# Altium PCB PCB1.PcbDoc
Units mm, origin at the board's own origin, x right, y up, seen from the top; angles counter-clockwise.
Board outline 127 x 101.6 mm, 4 copper layers (Top Layer, Internal Plane 1, Internal Plane 2, Bottom Layer); 11 components, 10 nets, 31 pads, 6 vias.
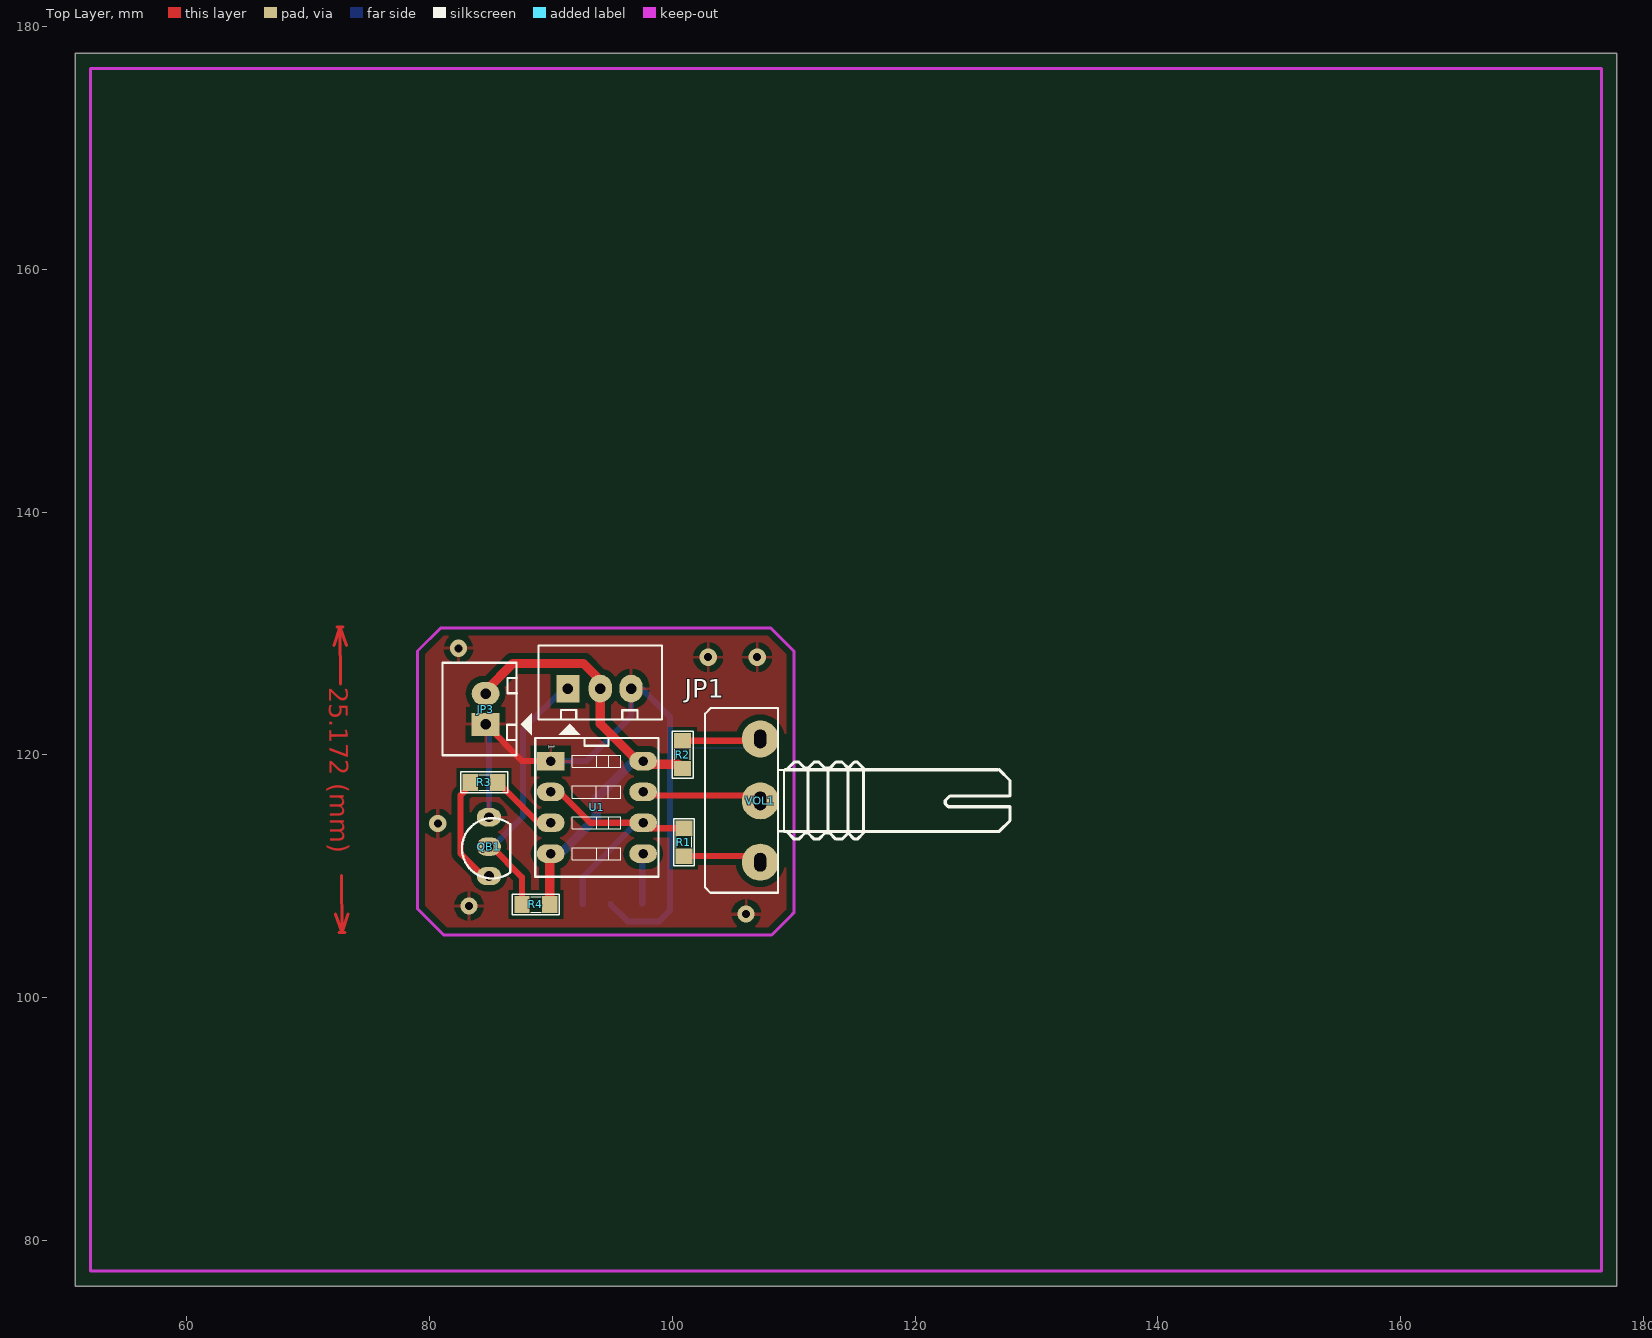
[diagram p0: Top Layer view]
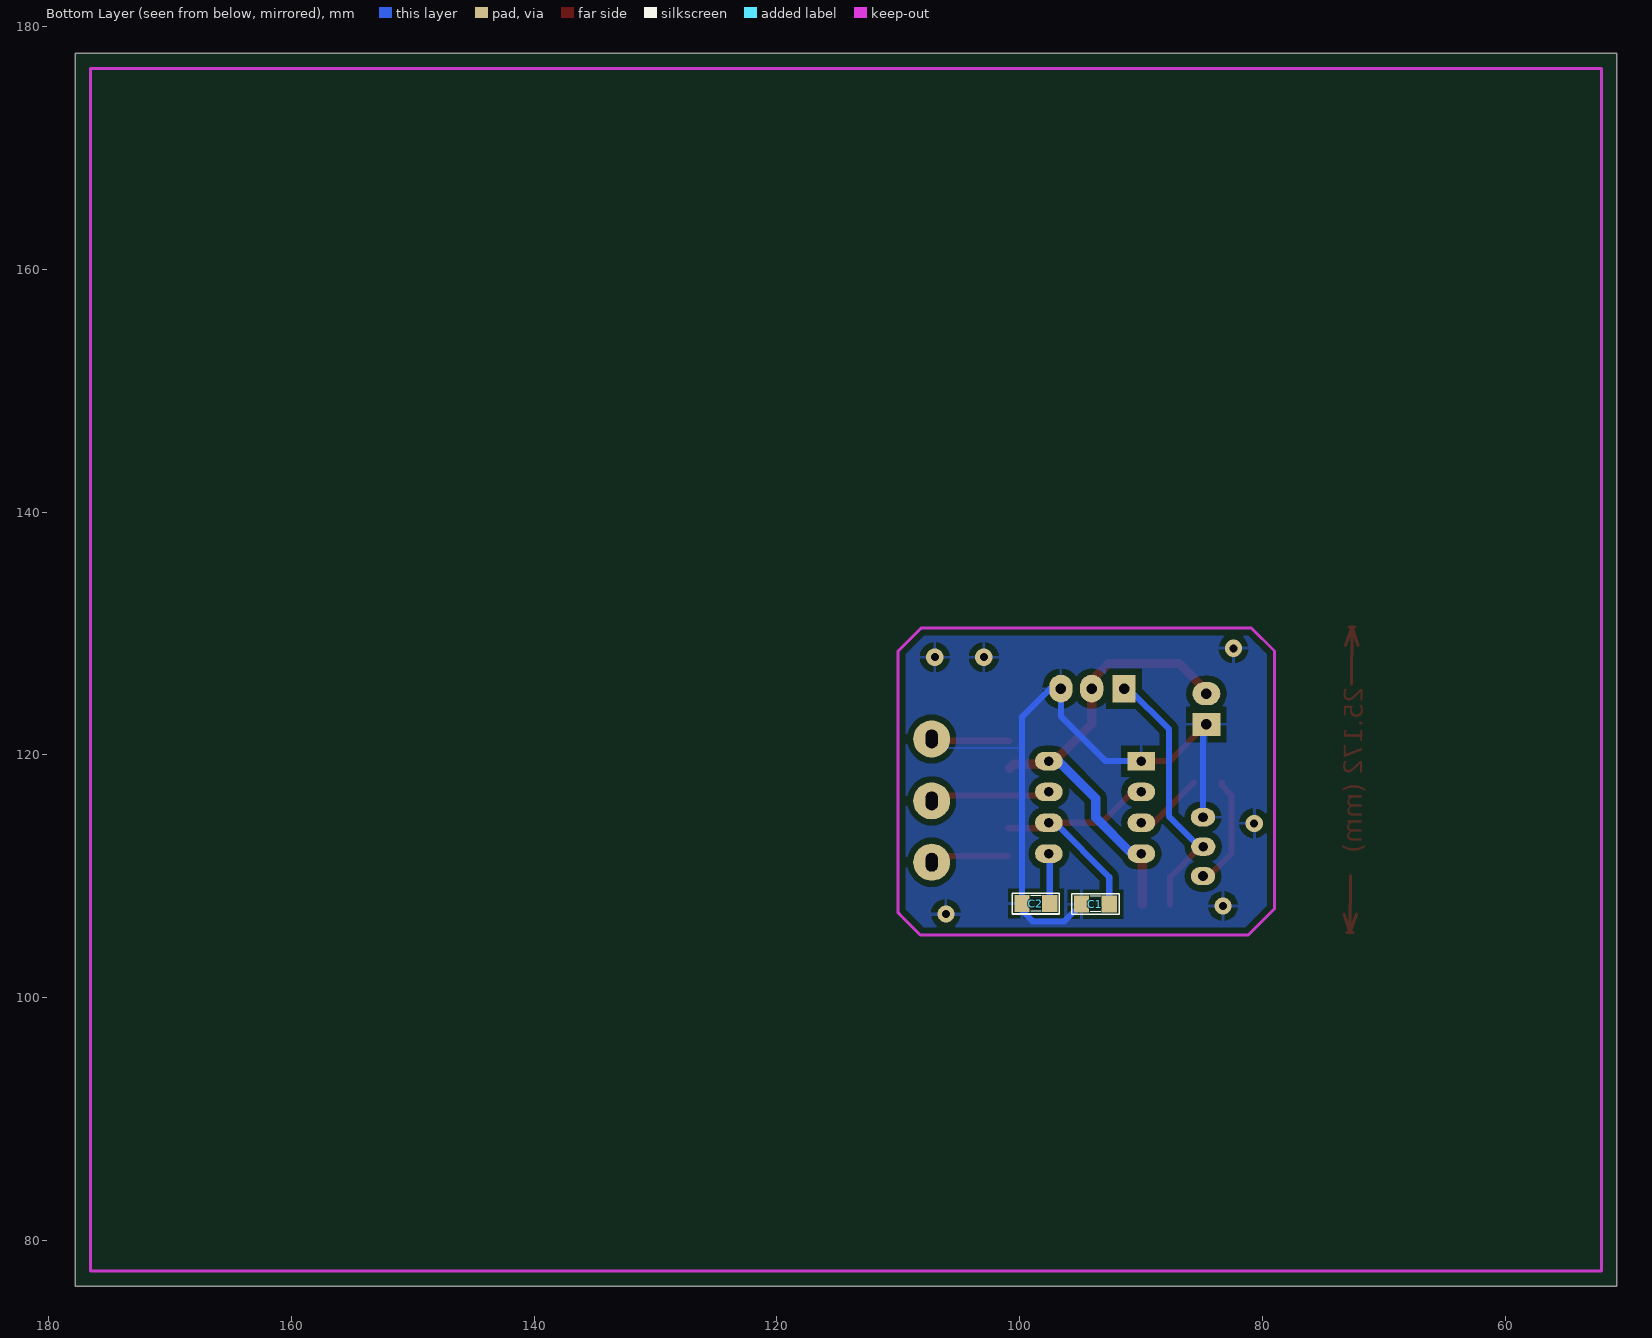
[diagram p1: Bottom Layer view, seen from below]
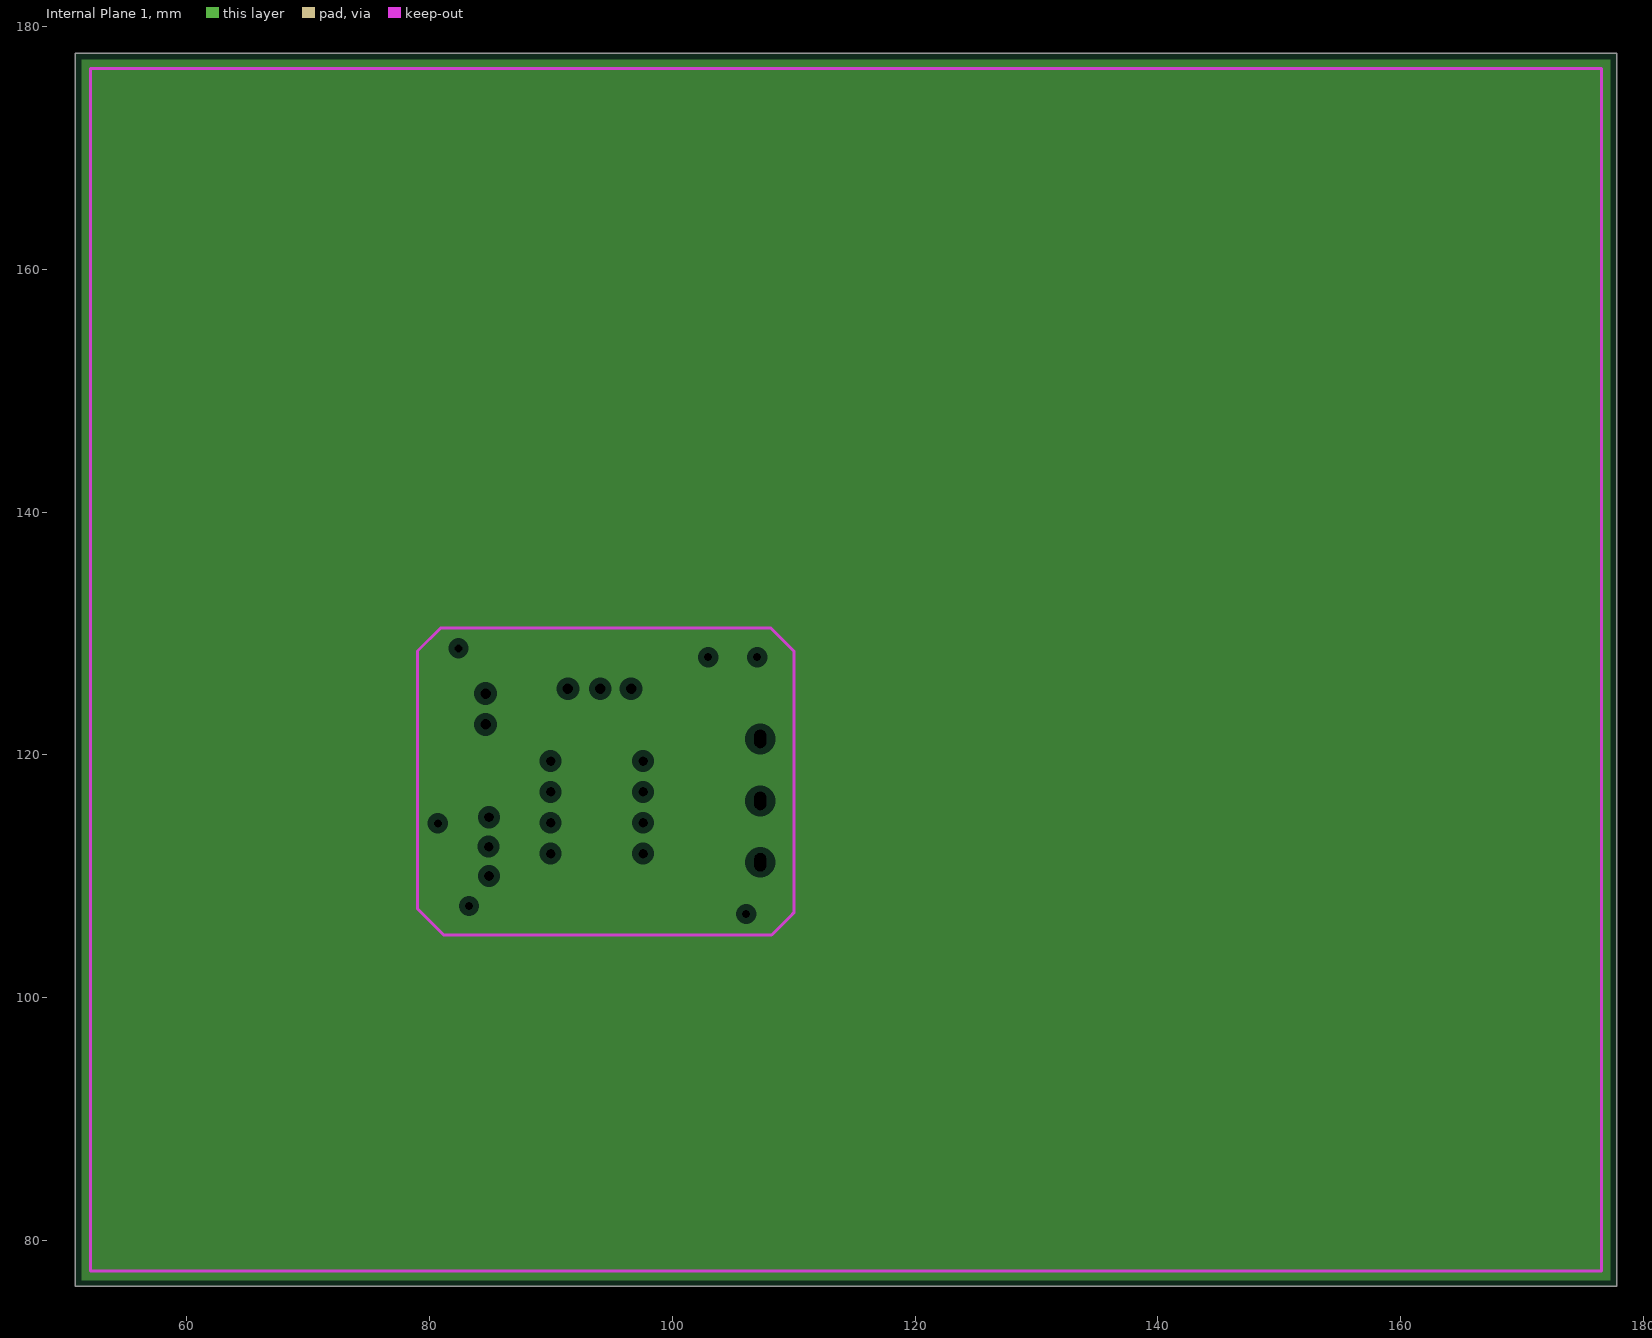
[diagram p2: Internal Plane 1, clearances drawn from the general rule]
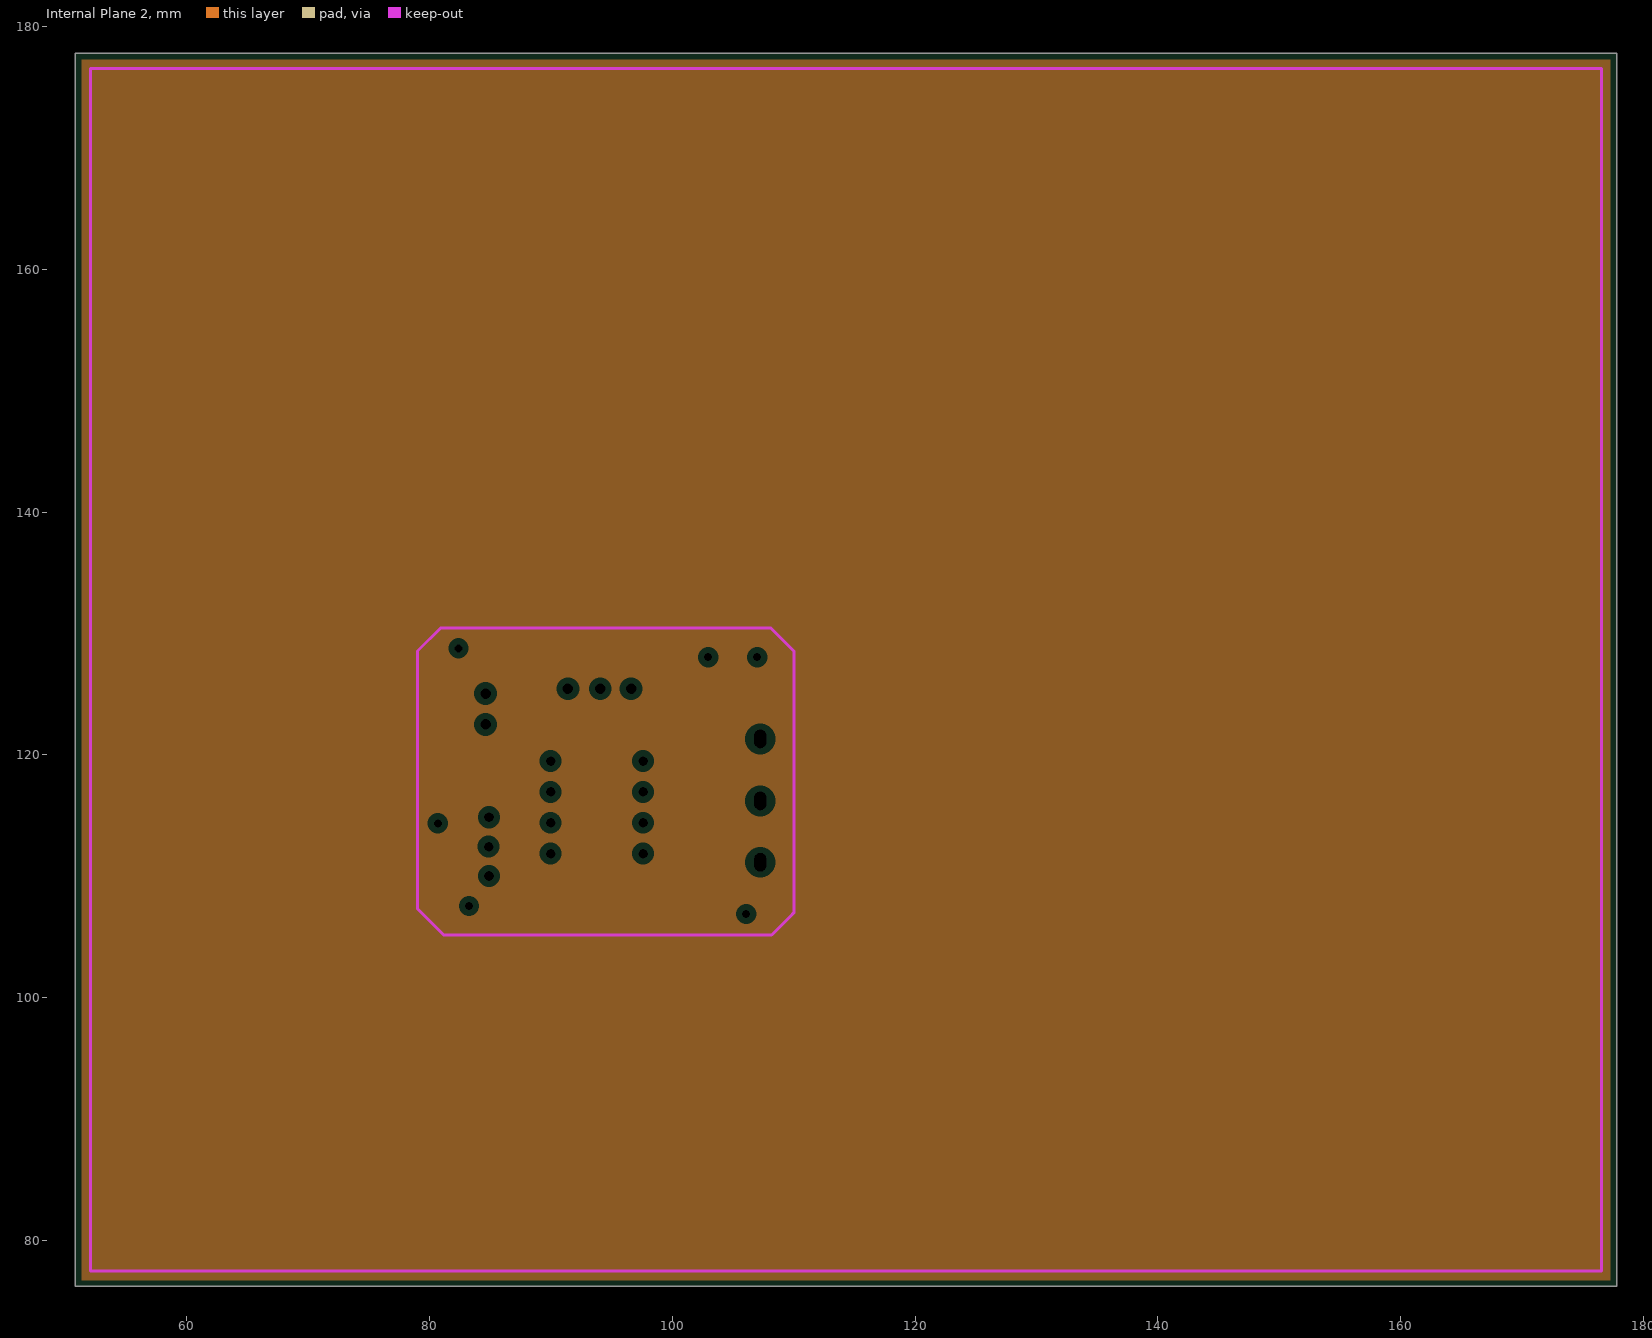
[diagram p3: Internal Plane 2, clearances drawn from the general rule]
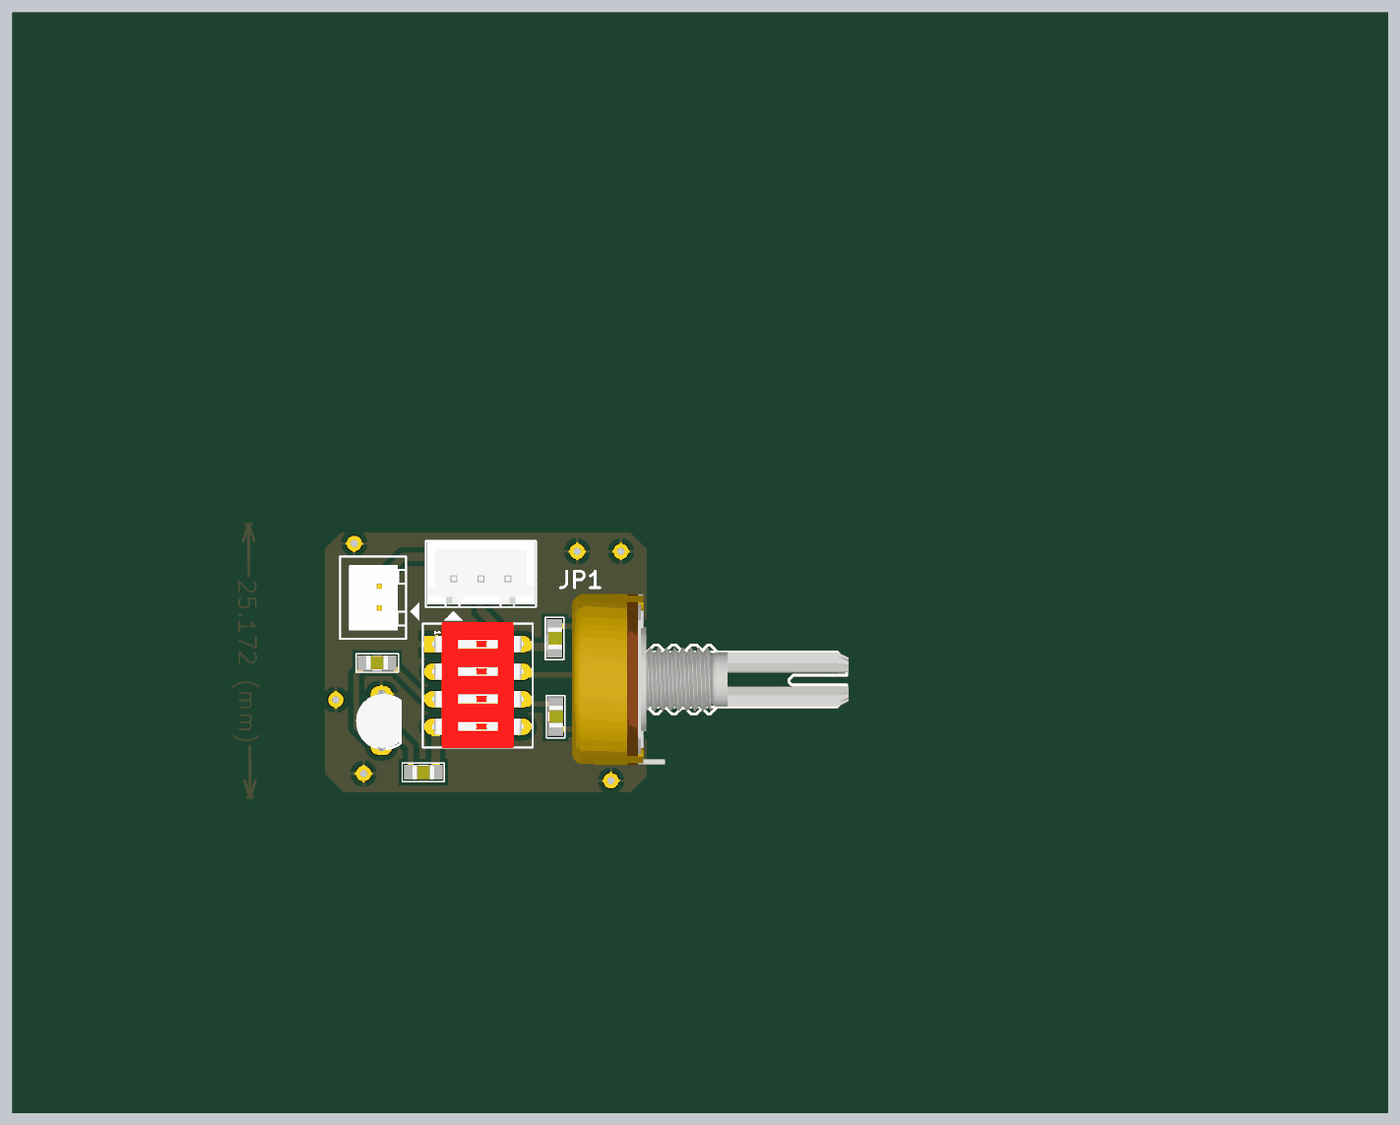
[diagram p4: 3D render of the assembled board from above, using the file's embedded part models]

## Layer stack, top to bottom
Top Solder: solder mask 0.0102, Solder Resist, Dk 3.5
Top Layer: signal copper 0.0356
Dielectric1: dielectric 0.32, FR-4, Dk 4.8
Internal Plane 1: plane copper 0.0356
Dielectric2: dielectric 0.32, FR-4, Dk 4.8
Internal Plane 2: plane copper 0.0356
Dielectric3: dielectric 0.32, FR-4, Dk 4.8
Bottom Layer: signal copper 0.0356
Bottom Solder: solder mask 0.0102, Solder Resist, Dk 3.5

## Board outline
50.8,76.2 177.8,76.2 177.8,177.8 50.8,177.8

## Design rules (kind name [scope] priority, off if disabled: settings)
Clearance Clearance_1 [All] p1: gap=0.508
Clearance [InNet('VCC')] p2: gap=0.762
PlaneClearance [All] p1: clearance=0.508
PlaneConnect [All] p1: planeconnectstyle=Relief reliefexpansion=0.508 reliefentries=4 reliefconductorwidth=0.254 reliefairgap=0.254
PolygonConnect [All] p1: connectstyle=Relief reliefconductorwidth=0.254 reliefentries=4 polygonreliefangle="90 Angle" airgapwidth=0.254
RoutingVias [All] p1: holewidth=0.635 width=1.016 viastyle="Through Hole" minholewidth=0.711 minwidth=1.27 maxholewidth=0.711 maxwidth=1.27
SilkToSolderMaskClearance SilkscreenOverComponentPads [IsPad] p1: minsilkscreentomaskgap=0.254 clearancetoexposedcopper=TRUE
SolderMaskExpansion [All] p1: expansion=0.102
Width Width_1 [InNet('VCC')] p1: maxlimit=0.762 minlimit=0.762 preferedwidth=0.762
Width [All] p2: maxlimit=0.508 minlimit=0.508 preferedwidth=0.508
27 further rules are at their usual default settings.

## Components (designator, comment, footprint, x,y, rotation, side; value= is the part's Value field where it differs from the comment)
C1 "104" SM-0805 93.751,107.696 r0 bottom
C2 "104" SM-0805 98.654,107.747 r180 bottom
JP1 "JP3" CON3 91.516,125.451 r0 top
JP3 "JP2" CON2 84.607,122.504 r90 top
QB1 "D718" TRAN-LOWPOWER 85.014,112.293 r0 top
R1 "15k" SM-0805 100.94,112.801 r90 top
R2 "220k" SM-0805 100.838,120.015 r90 top
R3 "10k" SM-0805 84.48,117.729 r180 top
R4 "10k" SM-0805 88.748,107.671 r0 top
U1 "NE555" DIP8/W0.3K 89.967,119.482 r270 top
VOL1 "15K" VOL_1 107.239,111.15 r90 top

## Footprints (in the part's own frame and the unit in brackets; to place one, negate y for a bottom-side part, rotate by r counter-clockwise, add the part's x,y. Pads: shape width x height; smd on the part's side, far side on the other; paste and mask are expansions set on the pad)
CON2 [mil] "CON2"
  rect 75x90 hole 34: 1(0,0)
  oval 75x90 hole 34: 2(100,0)
  silkscreen extent -100,-150 200,140, body extent -68,-70 168,107, height 236
CON3 [mil] "CON 3"
  rect 75x90 hole 34: 1(-5,0)
  oval 75x90 hole 34: 2(100,0) 3(200,0)
  silkscreen extent -100,-150 300,140, body extent -95,-90 295,136, height 276
DIP8/W0.3K [mil] "8 PIN, W 400mil , L 450mil, Pin to pin 100mil For Switch"
  rect 60x90 hole 31: 1(0,0)
  oval 60x90 hole 31: 2(100,0) 3(200,0) 4(300,0) 5(300,300) 6(200,300) 7(100,300) 8(0,300)
  silkscreen extent -75,-50 375,350, body extent -80,-45 378,345, height 158
SM-0805 [mil] "Compoment SMD 80x50mil"
  rect 50x55 smd: 1(-45,0) 2(45,0)
  silkscreen extent -77,-34 76,33, body extent -40,-27 40,23, height 24
TRAN-LOWPOWER [mm] "TO, Flat Index; 3 In-Line, Axial Leads; Body Dia. 4.5mm; Leads 0.51 x 0.48 mm (max)"
  oval 2x1.5 hole 0.8: 1(-0.127,-2.286) 2(-0.151,0.139) 3(-0.127,2.564)
  silkscreen extent -2.35,-2.48 1.63,2.48, body extent -2.48,-2.79 1.52,3.01, height 11
VOL_1 [mil]
  round 120 hole 40 slot 60 at 0 deg: 1(0,0) 2(199,0) 3(400,0)
  silkscreen extent -99,-810 500,179, body extent -110,-818 510,188, height 839

## Part data
C1 C2: library part CM, "Cap SMD"
JP1: library part Con3, "Connector 3"
JP3: library part Con2, "Connector 2"
QB1: "Transistor Power Supply"
R1 R2 R3 R4: library part R, "Resistor 1/4W"
VOL1: library part VOL-S, "Var Resistor"

## Via types
v1: diameter 1.422, hole 0.66, Top Layer to Bottom Layer, 6 vias

## Nets (pads, with @x,y where several pads share a name; then routed paths per layer and width w, separated by ;. In a path a pad name is that pad's centre, name@x,y a point inside that pad or via, vN(x,y) a via of type N, cw(c..) or ccw(c..) an arc to the next point about the centre after c; other vN are vias at no path point)
GND: C1.2 C2.1 JP1.3 JP3.1 QB1.3 U1.1 | length 50.8
  Top Layer w0.508: JP3.1 87.63,119.482 U1.1
  Bottom Layer w0.508: JP3.1 84.887,122.225 QB1.3 ; U1.1 92.913,119.482 96.596,123.165 JP1.3 97.485,125.451 99.797,123.139 C2.1 99.797,107.163 98.908,106.274 96.317,106.274 C1.2
  other v1: 106.07,106.883 83.236,107.544 80.67,114.351 102.946,128.041 106.985,128.041 82.372,128.778
NetC1_1: C1.1 R1.2 U1.2 U1.6 | length 21.3
  Top Layer w0.508: U1.2 90.678,116.942 93.218,114.402 U1.6 98.044,113.944 R1.2
  Bottom Layer w0.508: C1.1 92.608,109.931 97.079,114.402 U1.6
NetC2_2: C2.2 U1.5 | length 4.7
  Top Layer w0.508: U1.5@97.587,111.303 U1.5
  Bottom Layer w0.508: C2.2 97.511,111.785 U1.5
NetJP1_1: JP1.1 QB1.2 R4.1 | length 22.2
  Top Layer w0.508: QB1.2 85.103,112.432 87.605,109.931 R4.1
  Bottom Layer w0.508: QB1.2 85.204,112.432 87.681,114.91 87.681,122.098 91.034,125.451 JP1.1
NetQB1_1: QB1.1 R3.2 | length 9.3
  Top Layer w0.508: R3.2 83.337,117.475 82.55,116.688 82.55,111.862 84.404,110.007 QB1.1
NetR1_1: R1.1 VOL1.1 | length 6.9
  Top Layer w0.508: R1.1 106.731,111.658 107.061,111.328 107.061,110.973 VOL1.1
NetR2_2: R2.2 VOL1.3 | length 6.7
  Top Layer w0.508: R2.2 107.086,121.158 VOL1.3 ; VOL1.3@107.137,120.066 VOL1.3@107.417,120.066
NetR3_1: R3.1 U1.3 | length 5.7
  Top Layer w0.508: R3.1 88.951,114.402 U1.3
NetU1_7: U1.7 VOL1.2 | length 10
  Top Layer w0.508: U1.7 98.298,116.942 98.603,116.637 106.807,116.637 VOL1.2
VCC: JP1.2 JP3.2 R2.1 R4.2 U1.4 U1.8 | length 39
  Top Layer w0.762: JP3.2 84.607,125.273 86.868,127.533 92.659,127.533 94.056,126.136 JP1.2 94.056,122.555 97.13,119.482 U1.8 97.841,119.228 100.482,119.228 R2.1 ; R4.2 89.891,111.785 U1.4
  Bottom Layer w0.762: U1.4 90.754,111.862 93.726,114.833 93.726,116.408 96.799,119.482 U1.8
copper on no net: | length 16.8
  Top Layer w0.254: 72.115,128.999 72.614,130.526 ; 72.249,106.875 72.766,105.355 ; 72.36,130.524 72.868,130.528 ; 72.512,105.353 73.02,105.356 ; 72.642,125.837 72.614,130.526 ; 72.738,110.043 72.766,105.355 ; 73.131,129.005 72.614,130.526 ; 73.265,106.882 72.766,105.355

## Polygon pours and split planes (outlines as drawn)
GND on Bottom Layer "Top Layer-No Net" (solid, remove dead copper, pour order 4): 108.102,130.454 80.899,130.454 78.994,128.549 78.994,107.315 81.153,105.156 108.179,105.156 110.007,106.985 110.007,128.549 108.102,130.454
GND on Top Layer "Top Layer-No Net" (solid, remove dead copper, pour order 6): 80.899,130.454 108.102,130.454 110.007,128.549 109.931,128.473 109.931,106.909 108.204,105.181 108.179,105.156 81.153,105.156 78.994,107.315 78.994,128.549
no net on Internal Plane 1 (split plane): 177.29,76.71 51.31,76.71 51.31,177.29 177.29,177.29
no net on Internal Plane 2 (split plane): 177.29,76.71 51.31,76.71 51.31,177.29 177.29,177.29

## Keep-outs
Keep-Out Layer:
  lines w0.254: 82.271,130.454 106.375,130.454 108.102,130.454 110.007,128.549 110.007,109.042 110.007,106.985 109.728,106.705 108.179,105.156 106.375,105.156 81.153,105.156 78.994,107.315 78.994,111.125 78.994,114.579 78.994,128.549 80.899,130.454 82.372,130.454 ; 52.07,77.47 176.53,77.47 176.53,176.53 52.07,176.53 52.07,77.47

## Other copper
Top Layer:
  text "25.172 (mm)" at 71.73,125.578 h1.52 r270.35
Bottom Layer:
  rectangle net GND: 99.974,120.523 106.629,120.599
  rectangle net GND: 82.194,128.981 82.677,129.057

## Dimensions
52.07,77.47 to 176.53,77.47 on Mechanical 1
52.07,77.47 to 52.07,176.53 on Mechanical 1

## Text inside footprints (layer, text, board x,y; h text height)
U1: Top Overlay "1" at 89.814,120.853 h0.51 r270